# EAGLE board SwitchNode (EAGLE 7.2.0)
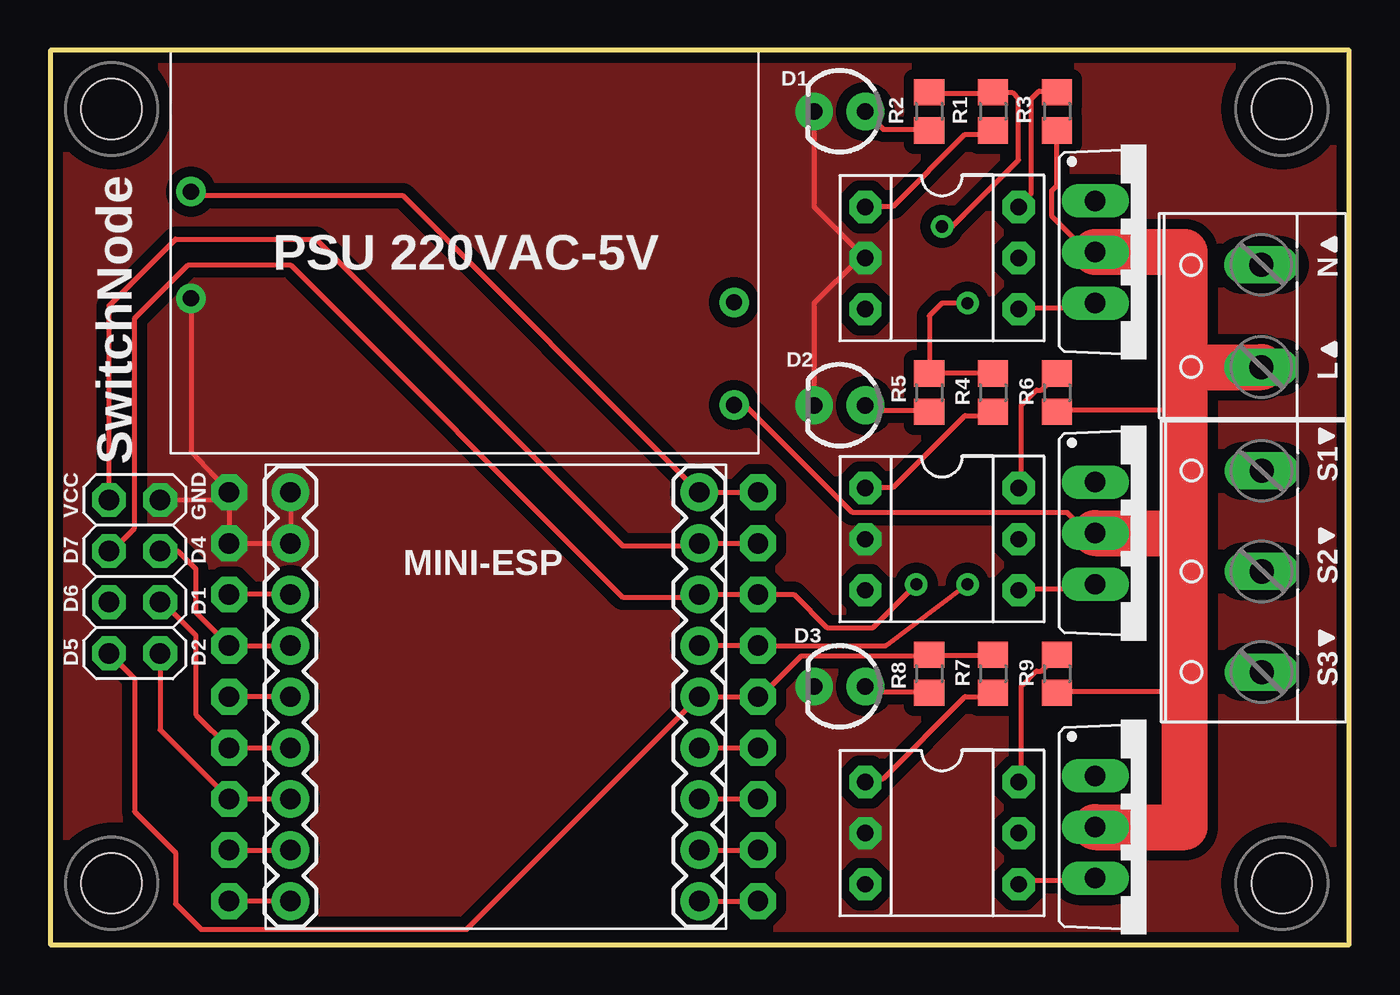
[diagram p0: board, top side]
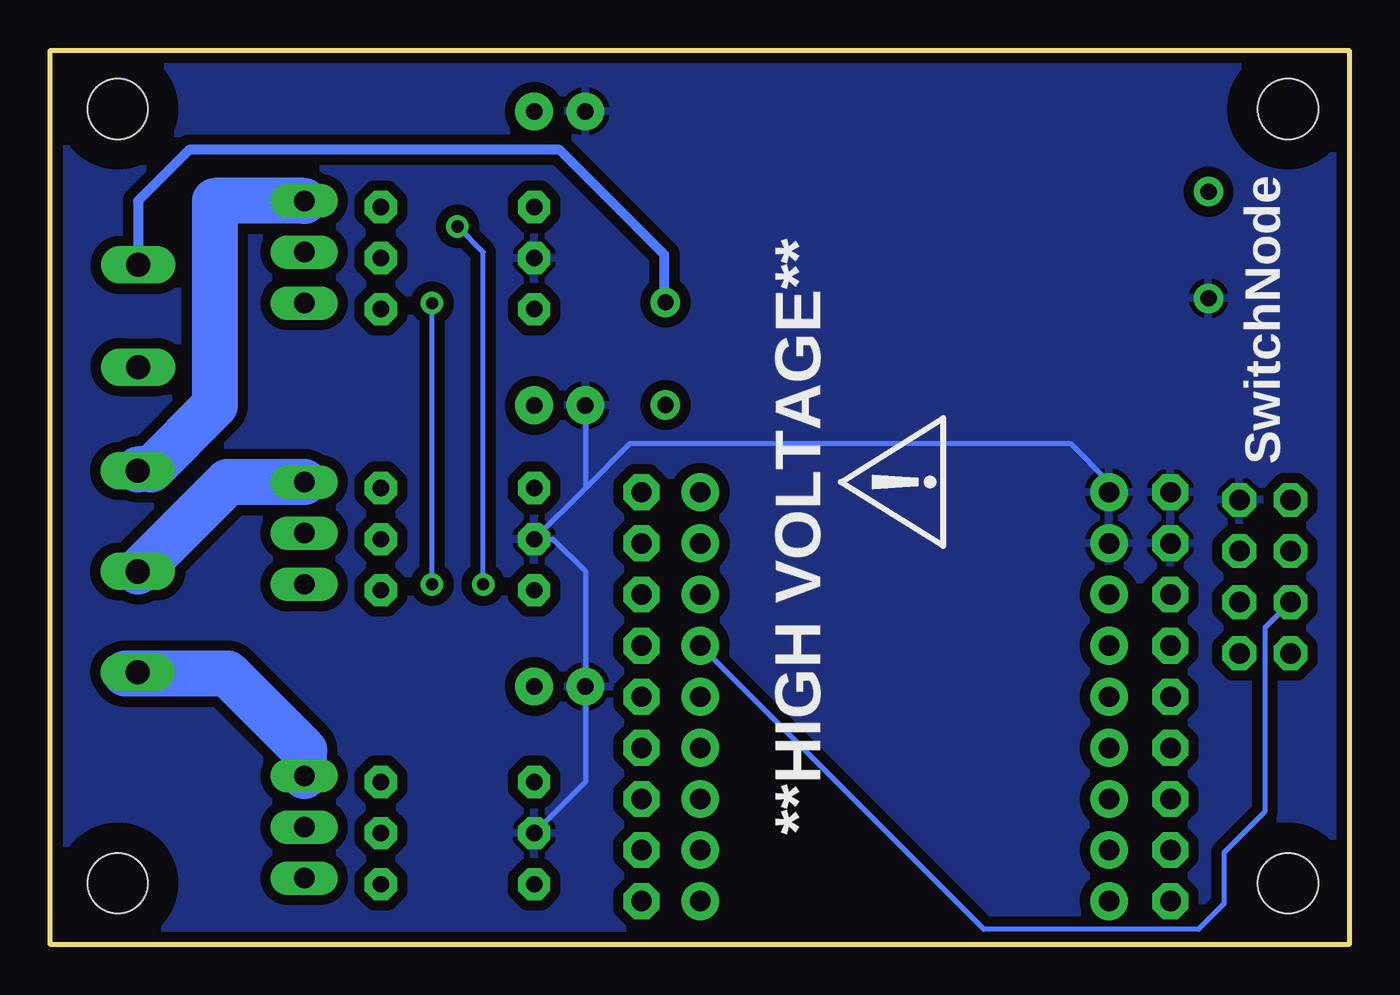
[diagram p1: board, bottom side, seen from below]

Size 64.57 x 44.44 mm. Coordinates in mm from the lower left corner, seen from the top.
Outline: 0,0 64.57,0 64.57,44.44 0,44.44 0,0
Copper layers (1*16): Top 0.035mm / dielectric 1.5mm / Bottom 0.035mm
Design rules "default *": minimum track width 10mil, minimum drill 24mil, track to track 10mil, track to pad 10mil, pad to pad 10mil, via to via 10mil, smd to smd 8mil, copper to edge 20mil, drill to drill 12mil, minimum pad ring 13mil, minimum via ring 10mil, stop-mask expansion 4mil, vias tented up to drill 0mil, thermal gap 10mil

## Footprints (pad centres in the part's own frame; a part is rotated, then mirrored left to right if it is on the bottom)
W237-132 = drill 1.194 long: 1 -2.54,-0.635; 2 2.54,-0.635
LED3MM = drill 0.813 pad 1.88: A -1.27,0; K 1.27,0
1X09-BIG = drill 1.016 pad 1.778 octagon: 1 -10.16,0; 2 -7.62,0; 3 -5.08,0; 4 -2.54,0; 5 0,0; 6 2.54,0; 7 5.08,0; 8 7.62,0; 9 10.16,0
2X04 = drill 1.016 pad 1.676 octagon: 1 -3.81,-1.27; 2 -3.81,1.27; 3 -1.27,-1.27; 4 -1.27,1.27; 5 1.27,-1.27; 6 1.27,1.27; 7 3.81,-1.27; 8 3.81,1.27
W237-103 = drill 1.194 long: 1 -5,-1.29; 2 0,-1.29; 3 5,-1.29
R0805 = smd 1.3 x 1.5: 1 -0.95,0; 2 0.95,0
TO220BV = drill 1.016 long: G 2.54,-2.54; T1 -2.54,-2.54; T2 0,-2.54
POWER_SUPPLY_220VAC_5V = drill 0.8: 5V 13.2,-3; AC_L -13.8,7.6; AC_N -13.8,2.5; GND 13.2,2.3
MINI-ESP = drill 1.016 pad 1.88: A0 -10.16,9.144; D0 -10.16,4.064; D1 10.16,4.064; D2 10.16,6.604; D3 10.16,1.524; D4 10.16,-1.016; D5 -10.16,1.524; D6 -10.16,-1.016; D7 -10.16,-3.556; D8 10.16,-3.556; EN -10.16,6.604; GND 10.16,-8.636; GND2 10.16,-6.096; RST -10.16,11.684; RX 10.16,9.144; TX 10.16,11.684; VCC -10.16,-6.096; VIN -10.16,-8.636
DIL06 = drill 0.813 pad 1.6 octagon: 1 -3.51,-3.81; 2 -0.97,-3.81; 3 1.57,-3.81; 4 1.57,3.81; 5 -0.97,3.81; 6 -3.51,3.81
KFH-M3 = hole 3: 0,0

## Placement (x,y rotation side)
AC  [W237-132]  59.56,31.24 90 top
D1  [LED3MM]  39.24,41.4 180 top
D2  [LED3MM]  39.24,26.8 180 top
D3  [LED3MM]  39.24,12.83 180 top
JP1  [1X09-BIG]  35.18,12.32 270 top
JP2  [2X04]  4.19,18.29 270 top
JP3  [1X09-BIG]  8.89,12.32 90 top
OUT  [W237-103]  58.93,18.54 90 top
R1  220  [R0805]  46.86,41.4 270 top
R2  10K  [R0805]  43.69,41.4 270 top
R3  470  [R0805]  50.04,41.4 270 top
R4  220  [R0805]  46.86,27.43 270 top
R5  10K  [R0805]  43.69,27.43 270 top
R6  470  [R0805]  50.04,27.43 270 top
R7  220  [R0805]  46.86,13.46 270 top
R8  10K  [R0805]  43.69,13.46 270 top
R9  470  [R0805]  50.04,13.46 270 top
T1  BT138-V  [TO220BV]  54.48,34.42 270 top
T2  BT138-V  [TO220BV]  54.48,20.45 270 top
T3  BT138-V  [TO220BV]  54.48,5.84 270 top
U$1  POWER_SUPPLY_220VAC_5V  [POWER_SUPPLY_220VAC_5V]  20.19,34.42 180 top
U$2  MINI-ESP  [MINI-ESP]  22.1,13.84 180 top
U$3  MOC3031-M  [DIL06]  44.32,33.15 270 top
U$4  MOC3031-M  [DIL06]  44.32,19.18 270 top
U$5  MOC3031-M  [DIL06]  44.32,4.57 270 top
U$6  [KFH-M3]  3.05,3.05 0 top
U$7  [KFH-M3]  61.21,3.05 0 top
U$8  [KFH-M3]  61.21,41.53 0 top
U$9  [KFH-M3]  3.05,41.53 0 top
U$10  [ICON_EXL-S]  22.1,22.99 90 bottom
U$11  [ICON_PIN1_B]  63.25,34.8 0 top
U$12  [ICON_PIN1_B]  63.25,29.59 0 top
U$13  [ICON_PIN1_B]  63.75,25.27 180 top
U$14  [ICON_PIN1_B]  63.75,20.32 180 top
U$15  [ICON_PIN1_B]  63.75,15.24 180 top

## Library data of the parts
AC = con-wago-508; OC_FARNELL: unknown; OC_NEWARK: unknown
D1-D3 = SparkFun-LED
JP1-JP3 = adafruit
OUT = con-wago-500; MPN: 237-103; OC_FARNELL: unknown; OC_NEWARK: 18M7116
R1-R9 = rcl
T1-T3 = triac
U$1 U$2 = My Eagle Lib
U$3-U$5 = SparkFun-DiscreteSemi
U$6-U$9 = penn-engineering
U$10-U$15 = dicons

## Nets
5V: JP1.1 U$1.5V U$2.VIN
A0: JP1.8 U$2.A0
AC_L: AC.1 R3.2 R6.2 R9.2 T1.T2 T2.T2 T3.T2 U$1.AC_L
AC_N: AC.2 U$1.AC_N
D0: JP1.6 U$2.D0
D1: JP2.6 JP3.4 U$2.D1
D2: JP2.8 JP3.3 U$2.D2
D3: JP3.5 U$2.D3
D4: JP2.4 JP3.6 U$2.D4
D5: JP1.5 JP2.7 R7.1 R8.1 U$2.D5
D6: JP1.4 JP2.5 R4.1 R5.1 U$2.D6
D7: JP1.3 JP2.3 R1.1 R2.1 U$2.D7
D8: JP3.7 U$2.D8
EN: JP1.7 U$2.EN
GND: D1.K D2.K D3.K JP2.2 JP3.8 JP3.9 U$1.GND U$2.GND U$2.GND2 U$3.2 U$4.2 U$5.2
N$1: R1.2 U$3.1
N$4: R3.1 U$3.6
N$6: R4.2 U$4.1
N$7: D2.A R5.2
N$9: R6.1 U$4.6
N$10: T1.G U$3.4
N$11: T2.G U$4.4
N$12: R7.2 U$5.1
N$13: D3.A R8.2
N$14: OUT.2 T2.T1
N$15: R9.1 U$5.6
N$16: T3.G U$5.4
N$17: OUT.1 T3.T1
N$18: D1.A R2.2
N$19: OUT.3 T1.T1
RST: JP1.9 U$2.RST
RX: JP3.2 U$2.RX
TX: JP3.1 U$2.TX
VCC: JP1.2 JP2.1 U$2.VCC

## Tracks (layer width: path | path; a pad name or v marks a point on that pad's centre or on a via)
5V
  Top 0.254: U$1.5V 7.11,37.21 17.53,37.21 U$2.VIN JP1.1
A0
  Top 0.254: U$2.A0 JP1.8
AC_L
  Top 0.254: 56.39,12.57 50.04,12.57 R9.2 | 56.39,26.54 50.04,26.54 R6.2 | R3.2 50.04,37.72 49.78,37.47 49.78,36.2 51.05,34.92 T1.T2 | U$1.AC_L 34.04,26.8 34.54,26.8 39.88,21.46 50.55,21.46 51.05,20.96 T2.T2
  Top 2.286: T3.T2 56.39,5.84 56.39,12.57 56.39,20.45 | 56.39,28.7 56.39,34.42 T1.T2 | T2.T2 56.39,20.45 | 56.39,20.45 56.39,26.54 56.39,28.7 | 56.39,28.7 AC.1
AC_N
  Bottom 0.254: 34.04,32.13 U$1.AC_N
  Bottom 0.508: 34.04,32.13 34.04,34.29 39.24,39.5 57.66,39.5 60.2,36.96 AC.2
D0
  Top 0.254: U$2.D0 JP1.6
D1
  Top 0.254: U$2.D1 JP3.4 7.24,11.43 7.24,15.37 5.59,17.02 JP2.6
D2
  Top 0.254: U$2.D2 JP3.3 5.46,10.67 JP2.8
D3
  Top 0.254: U$2.D3 JP3.5
D4
  Top 0.254: JP2.4 6.35,19.56 7.24,18.67 7.24,16.51 JP3.6 U$2.D4
D5
  Top 0.254: 43.69,14.35 46.74,14.35 R7.1 | 43.69,14.35 37.34,14.35 35.31,12.32 JP1.5 U$2.D5 20.7,0.76 7.49,0.76 6.22,2.03 6.22,4.57 4.19,6.6 4.19,13.21 JP2.7 | 43.69,14.35 R8.1
D6  (via drill 0.61)
  Top 0.254: U$2.D6 JP1.4 41.53,14.86 v45.59,17.91 | R4.1 R5.1 43.69,31.24 44.32,31.88 v45.59,31.88
  Bottom 0.254: U$2.D6 18.16,0.76 7.49,0.76 6.22,2.03 6.22,4.57 4.19,6.6 4.19,15.75 JP2.5 | v45.59,17.91 v45.59,31.88
D7  (via drill 0.61)
  Top 0.254: R2.1 43.69,42.29 46.74,42.29 R1.1 47.82,42.35 48.13,42.04 48.13,38.99 44.83,35.69 v44.32,35.69 | JP2.3 3.05,19.56 4.19,20.7 4.19,31.12 6.86,33.78 11.94,33.78 28.45,17.27 32.13,17.27 U$2.D7 JP1.3 36.96,17.4 38.61,15.75 40.89,15.75 v43.05,17.91
  Bottom 0.254: v43.05,17.91 43.05,34.42 v44.32,35.69
D8
  Top 0.254: U$2.D8 JP3.7
EN
  Top 0.254: U$2.EN JP1.7
GND
  Top 0.254: U$2.GND U$2.GND2 JP3.8 JP3.9 | JP2.2 8.38,22.1 JP3.9 | U$1.GND 6.99,24.5 JP3.9 | D1.K 37.97,36.66 U$3.2 40.21,34.12 37.97,31.88 D2.K
  Bottom 0.254: U$2.GND 11.94,22.99 13.84,24.89 35.77,24.89 37.97,22.69 | U$5.2 37.97,8.08 D3.K 37.97,18.54 39.58,20.15 U$4.2 37.97,22.69 | D2.K 37.97,22.69
  pour Bottom (isolate 0.508): -7.75,47.12 76.33,46.99 76.33,-4.44 -7.75,-4.32
  pour Top (isolate 0.508, no thermals): -7.75,47.12 76.33,46.99 76.33,-4.44 -7.75,-4.32
N$1
  Top 0.254: R1.2 46.74,40.26 45.47,40.26 41.91,36.7 40.64,36.7 U$3.1
N$4
  Top 0.254: 50.04,42.29 R3.1 49.97,42.42 49.15,42.42 48.77,42.04 48.77,37.34 U$3.6
N$6
  Top 0.254: R4.2 46.74,26.29 45.47,26.29 41.91,22.73 40.64,22.73 U$4.1
N$7
  Top 0.254: R5.2 43.69,26.54 40.89,26.54 40.64,26.8 D2.A
N$9
  Top 0.254: R6.1 50.04,28.32 49.28,27.56 49.02,27.56 48.26,26.8 48.26,22.73 U$4.6
N$10
  Top 0.254: U$3.4 48.26,31.62 51.56,31.62 51.82,31.88 T1.G
N$11
  Top 0.254: U$4.4 48.26,17.65 51.56,17.65 51.82,17.91 T2.G
N$12
  Top 0.254: R7.2 46.74,12.32 45.47,12.32 41.4,8.26 40.64,8.26 U$5.1
N$13
  Top 0.254: R8.2 43.69,12.57 40.89,12.57 40.64,12.83 D3.A
N$14
  Bottom 0.254: OUT.2 60.2,18.67 60.13,18.61
  Bottom 2.286: T2.T1 55.75,22.99 60.13,18.61 60.2,18.54
N$15
  Top 0.254: R9.1 50.04,14.35 49.28,13.59 49.02,13.59 48.26,12.83 48.26,8.26 U$5.6
N$16
  Top 0.254: U$5.4 48.26,3.18 51.82,3.18 T3.G
N$17
  Bottom 0.254: OUT.1 60.2,13.59 60.2,13.46
  Bottom 2.286: T3.T1 51.94,9.65 55.75,13.46 60.2,13.46 60.83,13.46
N$18
  Top 0.254: D1.A 41.4,40.51 43.69,40.51 R2.2
N$19
  Bottom 0.254: OUT.3 60.2,23.75 60.2,23.62
  Bottom 2.286: T1.T1 56.39,36.96 56.39,26.8 59.56,23.62 60.2,23.62
RST
  Top 0.254: U$2.RST JP1.9
RX
  Top 0.254: JP3.2 U$2.RX
TX
  Top 0.254: U$2.TX JP3.1
VCC
  Top 0.254: JP1.2 U$2.VCC 32.13,19.81 28.45,19.81 13.21,35.05 6.22,35.05 2.92,31.75 JP2.1

## Text on the board
tNames: PSU 220VAC-5V | N | L | SwitchNode | S1 | VCC | GND | D7 | D4 | S2 | D6 | D1 | D5 | D2 | S3
bNames: SwitchNode | **HIGH VOLTAGE**